# Altium PCB Main_PCB.PcbDoc (part 2 of 2)
Units mm, origin at the board's own origin, x right, y up, seen from the top; angles counter-clockwise.
Board outline 74.9 x 85.44 mm, 4 copper layers (Top Layer, 3V3, GND, Bottom Layer), stack 1.57 mm thick; 139 components, 106 nets, 541 pads, 0 vias.
Unrouted connection lines stored in the file: 412.
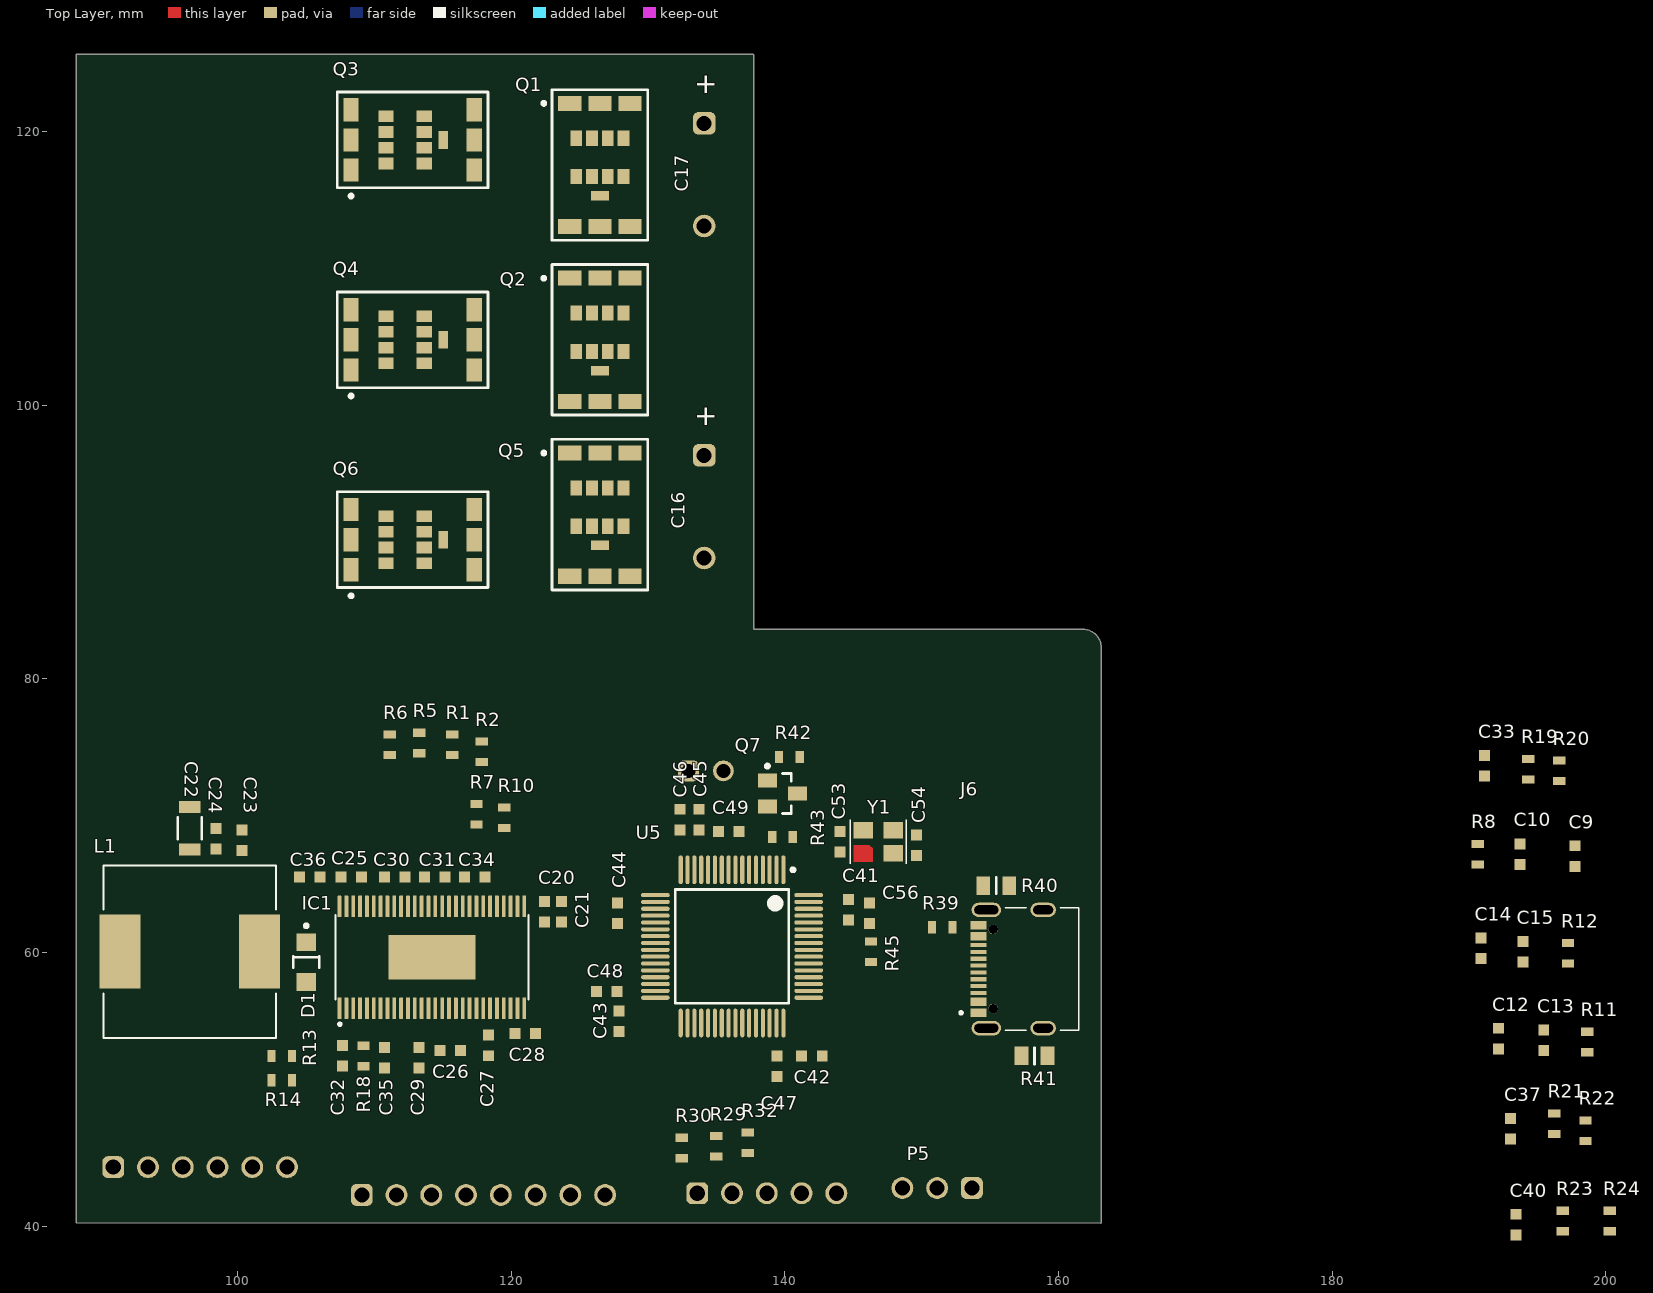
[diagram p0: Top Layer view]

## Nets (pads, with @x,y where several pads share a name; then routed paths per layer and width w, separated by ;. In a path a pad name is that pad's centre, name@x,y a point inside that pad or via, vN(x,y) a via of type N, cw(c..) or ccw(c..) an arc to the next point about the centre after c; other vN are vias at no path point) (continued)
VIN: C1.1 C2.1 C3.1 C4.1 C6.1 C7.1 C16.1 C17.1 C18.2 C19.2 C20.2 C21.2 IC1.29 IC1.53 IC1.54 Q1.1 Q1.2 Q1.3 Q1.13 Q1.14 Q1.15 Q2.1 Q2.2 Q2.3 Q2.13 Q2.14 Q2.15 Q5.1 Q5.2 Q5.3 Q5.13 Q5.14 Q5.15 R42.2
VSENSE: IC1.3 R13.1 R14.2
pads on no net: B1.4 B2.4 B3.4 IC1.4 IC1.5 IC1.12 IC1.25 IC1.26 J6. J6.A8 J6.B8 U5.3 U5.4 U5.20 U5.28 U5.29 U5.33 U5.50 U5.52 U5.53 U5.61 U5.62

## Silkscreen, mask and mechanical layers (free items; w line width, h text height)
Mechanical 1:
  lines w0.1: 163.068,81.788 163.068,82.296 ; 163.068,82.296 ccw(c163.068,82.296) 163.068,82.296 ; 163.068,82.296 ccw(c161.798,82.296) 161.798,83.566 137.668,83.566 137.668,125.603 88.265,125.603 88.265,40.259 163.068,40.259 163.068,82.296

## Text inside footprints (layer, text, board x,y; h text height)
C16: Top Overlay "+" at 134.874,98.298 h1.5 r90
C17: Top Overlay "+" at 134.874,122.555 h1.5 r90
J6: Top 3D Body "PCB EDGE" at 161.127,64.301 h0.81 r90